# EAGLE board PowerSupplyTest (EAGLE 9.4.2)
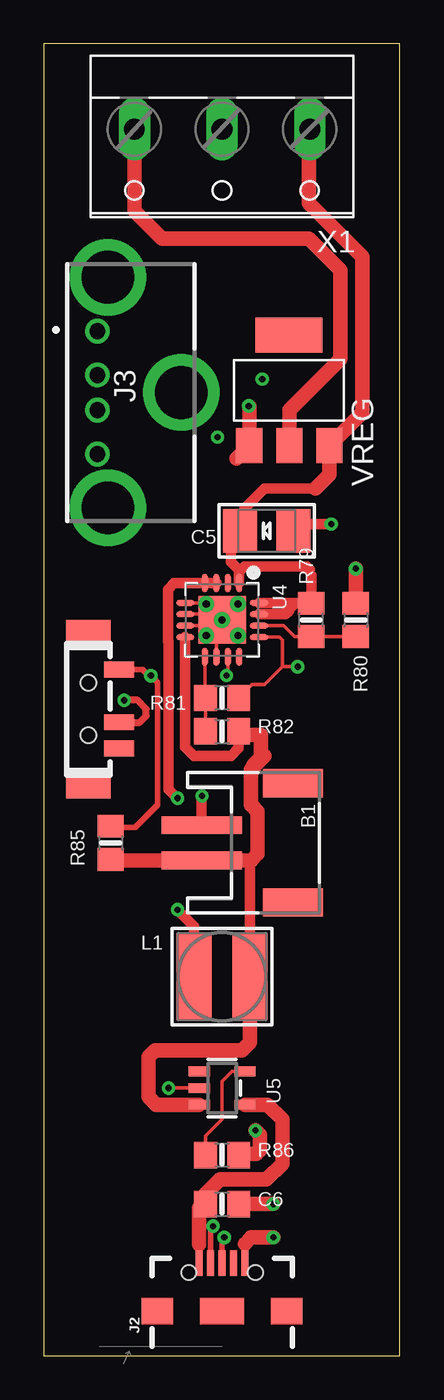
[diagram p0: board, top side]
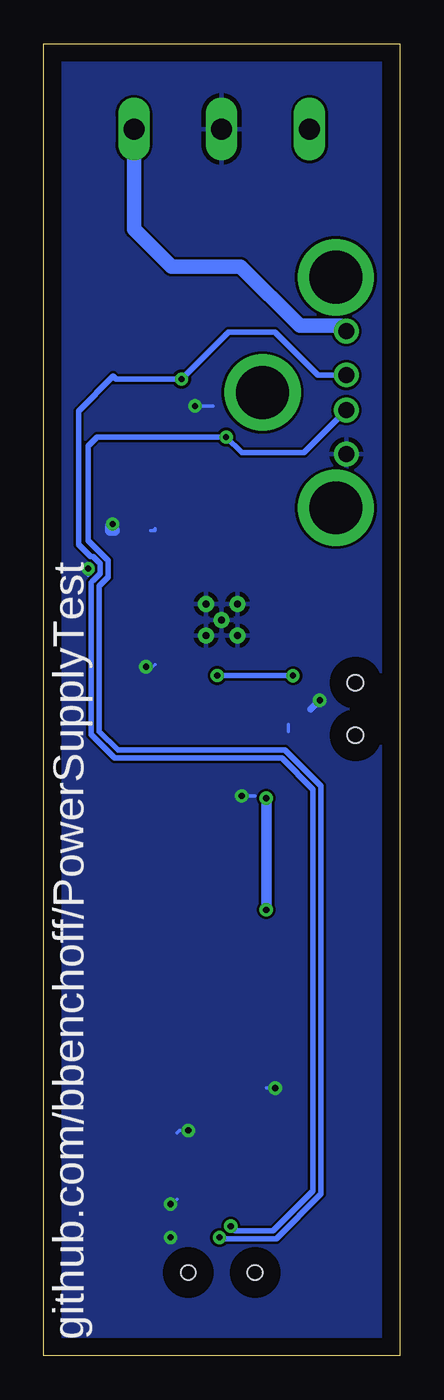
[diagram p1: board, bottom side, seen from below]

Size 20.3 x 74.73 mm. Coordinates in mm from the lower left corner, seen from the top.
Outline: 0,0 20.3,0 20.3,74.73 0,74.73 0,0
Copper layers (1*16): Top 0.035mm / dielectric 1.5mm / Bottom 0.035mm
Design rules "default": minimum track width 6mil, minimum drill 0.35mm, track to track 6mil, track to pad 6mil, pad to pad 6mil, via to via 6mil, smd to smd 6mil, copper to edge 40mil, drill to drill 6mil, minimum pad ring 10mil, minimum via ring 8mil, stop-mask expansion 4mil, vias tented up to drill 0mil, thermal gap 10mil
Net classes: 0 default: width 0.102 mm, drill 0.102 mm, clearance 0.152 mm; 1 diff_pairs: width 0.254 mm, clearance 0.102 mm

## Footprints (pad centres in the part's own frame; a part is rotated, then mirrored left to right if it is on the bottom)
JSTPH2 = smd 1 x 4.6: 1 -1,-3.7; 2 1,-3.7 | smd 1.6 x 3.4: NC1 -3.4,1.5; NC2 3.4,1.5
EIA3528-21/B-R = smd 1.95 x 2.5: + 1.525,0; - -1.525,0
0805-NO = smd 1.3 x 1.5: 1 -0.95,0; 2 0.95,0
USB-B-MICRO-SMD = smd 1.45 x 0.4: D+ 2.725,0; D- 2.725,0.65; GND 2.725,-1.3; ID 2.725,-0.65; VBUS 2.725,1.3 | smd 1.5 x 1.8: SHIELD1 0,3.685; SHIELD2 0,-3.685 | smd 1.5 x 2.5: SHIELD3 0,0 | hole 0.85: 2.2,1.9; 2.2,-1.9
105057-0001 = drill 0.9 pad 1.4: 1 -3.5,-1.9; 2 -1,-1.9; 3 1,-1.9; 4 3.5,-1.9 | drill 3 pad 4.35: 5 6.57,-1.3; 6 0,2.88; 7 -6.57,-1.3
INDUCTOR_5X5MM_TDK_VLC5045 = smd 2 x 5: P$1 -1.6,0; P$2 1.6,0
PVQFN-16 = smd 1.05 x 0.35: 1 -2.1,0.975; 2 -2.1,0.325; 3 -2.1,-0.325; 4 -2.1,-0.975; 9 2.1,-0.975; 10 2.1,-0.325; 11 2.1,0.325; 12 2.1,0.975 | smd 0.35 x 1.05: 5 -0.975,-2.1; 6 -0.325,-2.1; 7 0.325,-2.1; 8 0.975,-2.1; 13 0.975,2.1; 14 0.325,2.1; 15 -0.325,2.1; 16 -0.975,2.1 | drill 0.4: P$18 0,0; P$19 -0.9,0.9; P$20 0.9,0.9; P$21 0.9,-0.9; P$22 -0.9,-0.9 | smd 2.7 x 2.7: THERMAL 0,0
SOT23-5 = smd 0.55 x 1.2: 1 -0.95,-1.3; 2 0,-1.3; 3 0.95,-1.3; 4 0.95,1.3; 5 -0.95,1.3
SWITCH-SSSS810701 = smd 0.9 x 1.7: 1 -2.25,1.75; 2 0.75,1.75; 3 2.25,1.75 | smd 1.27 x 2.54: P$1 -4.445,0; P$2 4.445,0 | hole 0.9: -1.5,0; 1.5,0
SOT223 = smd 1.499 x 2.007: 1 -2.261,-3.15; 2 0.025,-3.15; 3 2.311,-3.15 | smd 3.81 x 2.007: 4 0,3.15
W237-103 = drill 1.194 long: 1 -5,-1.29; 2 0,-1.29; 3 5,-1.29

## Placement (x,y rotation side)
B1  S2B-PH-SM4-TB(LF)(SN)  [JSTPH2]  12.7,29.21 270 top
C5  100uF/6V  [EIA3528-21/B-R]  12.7,46.99 180 top
C6  10µF  [0805-NO]  10.16,8.64 0 top
J2  [USB-B-MICRO-SMD]  10.16,2.54 90 top
J3  105057-0001  [105057-0001]  4.95,54.86 270 top
L1  VLC5045-6.8uH  [INDUCTOR_5X5MM_TDK_VLC5045]  10.16,21.59 180 top
R79  1.87Mohm  [0805-NO]  15.24,41.91 90 top
R80  200K  [0805-NO]  17.78,41.91 270 top
R81  340K  [0805-NO]  10.16,37.47 180 top
R82  1.87Mohm  [0805-NO]  10.16,35.56 0 top
R85  340k  [0805-NO]  3.81,29.21 270 top
R86  2k  [0805-NO]  10.16,11.43 0 top
U4  TPS61090RSAR  [PVQFN-16]  10.16,41.91 270 top
U5  MCP73831T-2ACI/OT  [SOT23-5]  10.16,15.24 270 top
U$20  TINDIE_SWITCH  [SWITCH-SSSS810701]  2.54,36.83 270 top
VREG  REG1117  [SOT223]  13.97,54.99 0 top
X1  [W237-103]  10.16,68.58 180 top

## Library data of the parts
B1 C5 C6 L1 R79-R82 R85 R86 U4 U5 = microbuilder
J2 = SparkFun-Connectors; PROD_ID: CONN-11752
J3 = SamacSys_Parts; DESCRIPTION: Type A 2.0mm shielded USB PCB receptacle Molex 105057 Series, Vertical Version 2.0 Type A USB Connector, Through Hole Socket, 30 V, 1.5A; HEIGHT: mm; MANUFACTURER_NAME: Molex; MANUFACTURER_PART_NUMBER: 105057-0001; MOUSER_PART_NUMBER: 538-105057-0001; MOUSER_PRICE-STOCK: https://www.mouser.com/Search/Refine.aspx?Keyword=538-105057-0001
U$20 = TindieBadge
VREG = burr-brown; MPN: REG1117; OC_FARNELL: 1097566; OC_NEWARK: 14P6981
X1 = con-wago-500; MPN: 237-103; OC_FARNELL: unknown; OC_NEWARK: 18M7116

## Nets
3V3: VREG.2 X1.3
5.0V: C5.+ J3.1 R79.2 U4.1 U4.15 U4.16 VREG.3 X1.1
ENABLE: R85.1 U4.11 U$20.1
GND: B1.1 C5.- C6.2 J2.GND J3.4 R80.1 R81.1 R86.2 U4.5 U4.6 U4.7 U4.10 U4.13 U4.P$18 U4.P$19 U4.P$20 U4.P$21 U4.P$22 U4.THERMAL U5.2 U$20.2 VREG.1 X1.2
N$73: L1.P$2 U4.3 U4.4
N$74: R81.2 R82.1 U4.9
N$76: R79.1 R80.2 U4.14
N$81: R86.1 U5.5
USB_N [diff_pairs]: J2.D- J3.2
USB_P [diff_pairs]: J2.D+ J3.3
VBAT: B1.2 L1.P$1 R82.2 R85.2 U4.8 U5.3
VDD1: C6.1 J2.VBUS U5.4

## Tracks (layer width: path | path; a pad name or v marks a point on that pad's centre or on a via)
3V3
  Top 0.813: X1.3 5.16,65.2 6.73,63.63 15.11,63.63 16.89,61.85 16.89,56.77 13.99,53.87 VREG.2
5.0V
  Top 0.203: U4.16 13.97,42.88 | 13.97,42.88 14.35,42.88 15.21,42.88 | 15.21,42.88 R79.2 | 14.86,44.96 14.99,44.96 | 15.18,44.77 15.24,44.7 15.24,44.45 | 15.24,43.05 15.24,42.93 15.24,42.91 15.21,42.88 | 13.59,42.23 13.79,42.23 13.97,42.42 13.97,42.88
  Top 0.61: U4.16 14.35,42.88 | 14.35,42.88 15.2,42.88 15.24,42.93 | U4.15 13.59,42.23 | 13.97,42.42 13.79,42.23 13.79,42.32 14.35,42.88 | U4.1 11.13,44.66 11.18,44.7 | 11.18,44.7 11.43,44.96 14.86,44.96 | 14.99,44.96 15.18,44.77 | 15.24,44.45 15.24,43.05 | 11.18,44.7 10.67,45.21 10.67,46.48 C5.+ 11.43,47.24 11.43,48.26 12.57,49.4 15.49,49.4
  Top 0.813: 15.49,49.4 16.28,50.19 VREG.3 18.16,53.72 18.16,62.61 15.11,65.66 15.11,69.82 X1.1
  Bottom 0.813: X1.1 15.16,64.18 13.02,62.04 9.08,62.04 5.71,58.67 3.36,58.67 J3.1
ENABLE  (via drill 0.35)
  Top 0.203: U$20.1 4.38,38.99 | v10.41,38.75 10.48,38.82 U4.11
  Top 0.305: U$20.1 5.62,39.08 5.97,38.73 v6.1,38.73 6.48,38.35 6.48,31.37 5.21,30.1 3.87,30.1 R85.1
  Bottom 0.203: 10.28,38.61 v10.41,38.75
  Bottom 0.305: v6.1,38.73 10.4,38.73 v10.41,38.75
GND  (via drill 0.35)
  Top 0.203: R81.1 11.87,38.23 12.57,38.23 13.59,39.24 | 13.59,39.24 13.59,40.77 13.42,40.94 U4.13 | 13.59,39.24 v14.48,39.24 | 11.71,54.08 v11.68,54.1 | J2.GND 11.46,6.38 11.81,6.73 | 12.13,11.49 12.32,11.68 | U5.2 v7.11,15.24 | U4.5 9.19,42.88 U4.P$22 | U4.6 9.84,42.23 10.1,41.97 | 10.1,41.97 U4.THERMAL 9.84,41.59 U4.10 | U4.7 9.71,41.59 10.1,41.97
  Top 0.406: U$20.2 5.45,36.08 5.46,36.07 5.84,36.45 5.84,36.83 5.33,37.34 v4.57,37.34
  Top 0.61: B1.1 9,31.86 v9.02,31.88 | C5.- 14.61,47.37 v16.38,47.37
  Top 0.813: 11.71,54.08 VREG.1 10.98,51.11 | R80.1 v17.78,44.83 | v13.08,6.73 11.81,6.73 11.46,6.38 | C6.2 v13.08,8.64 | R86.2 11.17,11.49 12.13,11.49 | 12.32,11.68 12.32,12.57 v12.06,12.83
  Bottom 0.203: v9.02,31.88 8.26,31.88 | 6.35,35.94 6.35,35.56 | v14.48,39.24 14.1,39.24 13.97,39.37 | v17.78,44.83 17.78,44.45 | C5.- 13.97,46.99 13.97,47.12 | v11.68,54.1 10.67,54.1 | v13.08,8.64 12.95,8.64 12.7,8.89 | v12.06,12.83 12.57,12.83 12.7,12.7 | v7.11,15.24 7.62,15.24
  Bottom 0.406: v4.57,37.34 5.08,36.83
  Bottom 0.61: v16.38,47.37 16.51,47.24 16.51,46.99 16.26,46.99
  pour Bottom: 0,0 20.32,0 20.32,74.68 0,74.68
N$73  (via drill 0.35)
  Top 0.61: U4.3 U4.4 7.43,44.01 7.08,43.65 7.08,40.67 7.11,40.64 7.11,32.26 v7.62,31.75 | v7.62,25.4 8.56,24.46 L1.P$2
  Bottom 0.61: v7.62,31.75 v7.62,25.4
N$74
  Top 0.203: U4.9 9.19,37.49 R81.2 R82.1
N$76
  Top 0.203: U4.14 13.66,41.59 14.29,40.96 R79.1 R80.2
N$81
  Top 0.203: R86.1 9.21,12.51 10.16,13.46 10.16,15.62 10.73,16.19 U5.5
USB_N  (via drill 0.35)
  Top 0.305: v9.64,7.37 9.51,7.24 J2.D- | 12.43,55.61 v12.45,55.63
  Bottom 0.305: v9.64,7.37 9.38,7.11 7.24,7.11 4.95,9.4 4.95,32.26 6.73,34.04 16.27,34.04 17.6,35.37 17.6,44.05 17.51,44.15 17.5,44.15 17.1,44.55 17.1,45.11 17.5,45.51 17.62,45.51 18.32,46.22 18.32,53.82 16.35,55.79 16.19,55.63 v12.45,55.63 9.78,58.29 7.11,58.29 4.68,55.86 J3.2
USB_P  (via drill 0.35)
  Top 0.305: v10.29,6.73 10.16,6.6 J2.D+
  Bottom 0.305: v10.29,6.73 10.21,6.66 7.05,6.66 4.5,9.21 4.5,32.45 6.54,34.49 16.08,34.49 17.14,35.56 17.14,43.85 16.64,44.36 16.64,45.3 17.78,46.44 17.78,51.82 17.27,52.32 v9.91,52.32 9.02,51.44 5.48,51.44 J3.3
VBAT
  Top 0.203: 10.54,34.16 10.67,34.16 11.11,34.6 11.11,35.43 R82.2 12.19,35.56 12.38,35.37 12.57,35.18 12.57,34.16 | 4.06,28.21 3.86,28.21 R85.2 | B1.2 11.81,28.21 | 11.81,28.21 11.83,28.21 | 12.19,30.86 12.19,30.99 | 11.81,33.4 11.81,33.27 | 11.76,27.94 11.76,28.16 11.81,28.21
  Top 0.406: 11.76,21.08 L1.P$1 | 6.35,17.4 11.3,17.4
  Top 0.61: L1.P$1 11.76,27.94 | 11.83,28.21 12.19,28.57 | 10.54,34.16 8.56,34.16 8.06,34.66 U4.8 | 10.67,34.16 11.11,34.6 R82.2
  Top 0.813: 12.19,30.99 12.06,31.11 11.94,31.24 11.81,31.37 11.81,33.27 11.94,33.4 11.94,33.64 12.38,34.08 12.38,35.37 11.17,35.37 11.11,35.43 | 11.81,33.4 12.57,34.16 | 12.19,30.86 12.19,29.59 12.19,28.57 11.83,28.21 B1.2 4.06,28.21 | U5.3 6.41,14.29 5.97,14.73 5.97,17.02 6.35,17.4 11.3,17.4 11.76,17.86 11.76,21.08
VDD1
  Top 0.203: 10.03,10.03 9.91,10.03 9.21,9.34 9.21,8.76 C6.1 8.86,8.29 8.86,6.35 J2.VBUS
  Top 0.813: 8.86,6.35 8.86,8.41 9.21,8.76 | C6.1 9.21,9.21 10.03,10.03 12.7,10.03 13.59,10.92 13.59,13.46 12.76,14.29 U5.4

## Text on the board
bPlace: github.com/bbenchoff/PowerSupplyTest